# Altium PCB WS2812B_Ring_Light.PcbDoc
Units mm, origin at the board's own origin, x right, y up, seen from the top; angles counter-clockwise.
Board outline 100 x 100 mm, 2 copper layers (Top Layer, Bottom Layer); 89 components, 47 nets, 284 pads, 81 vias.
Unrouted connection lines stored in the file: 181.
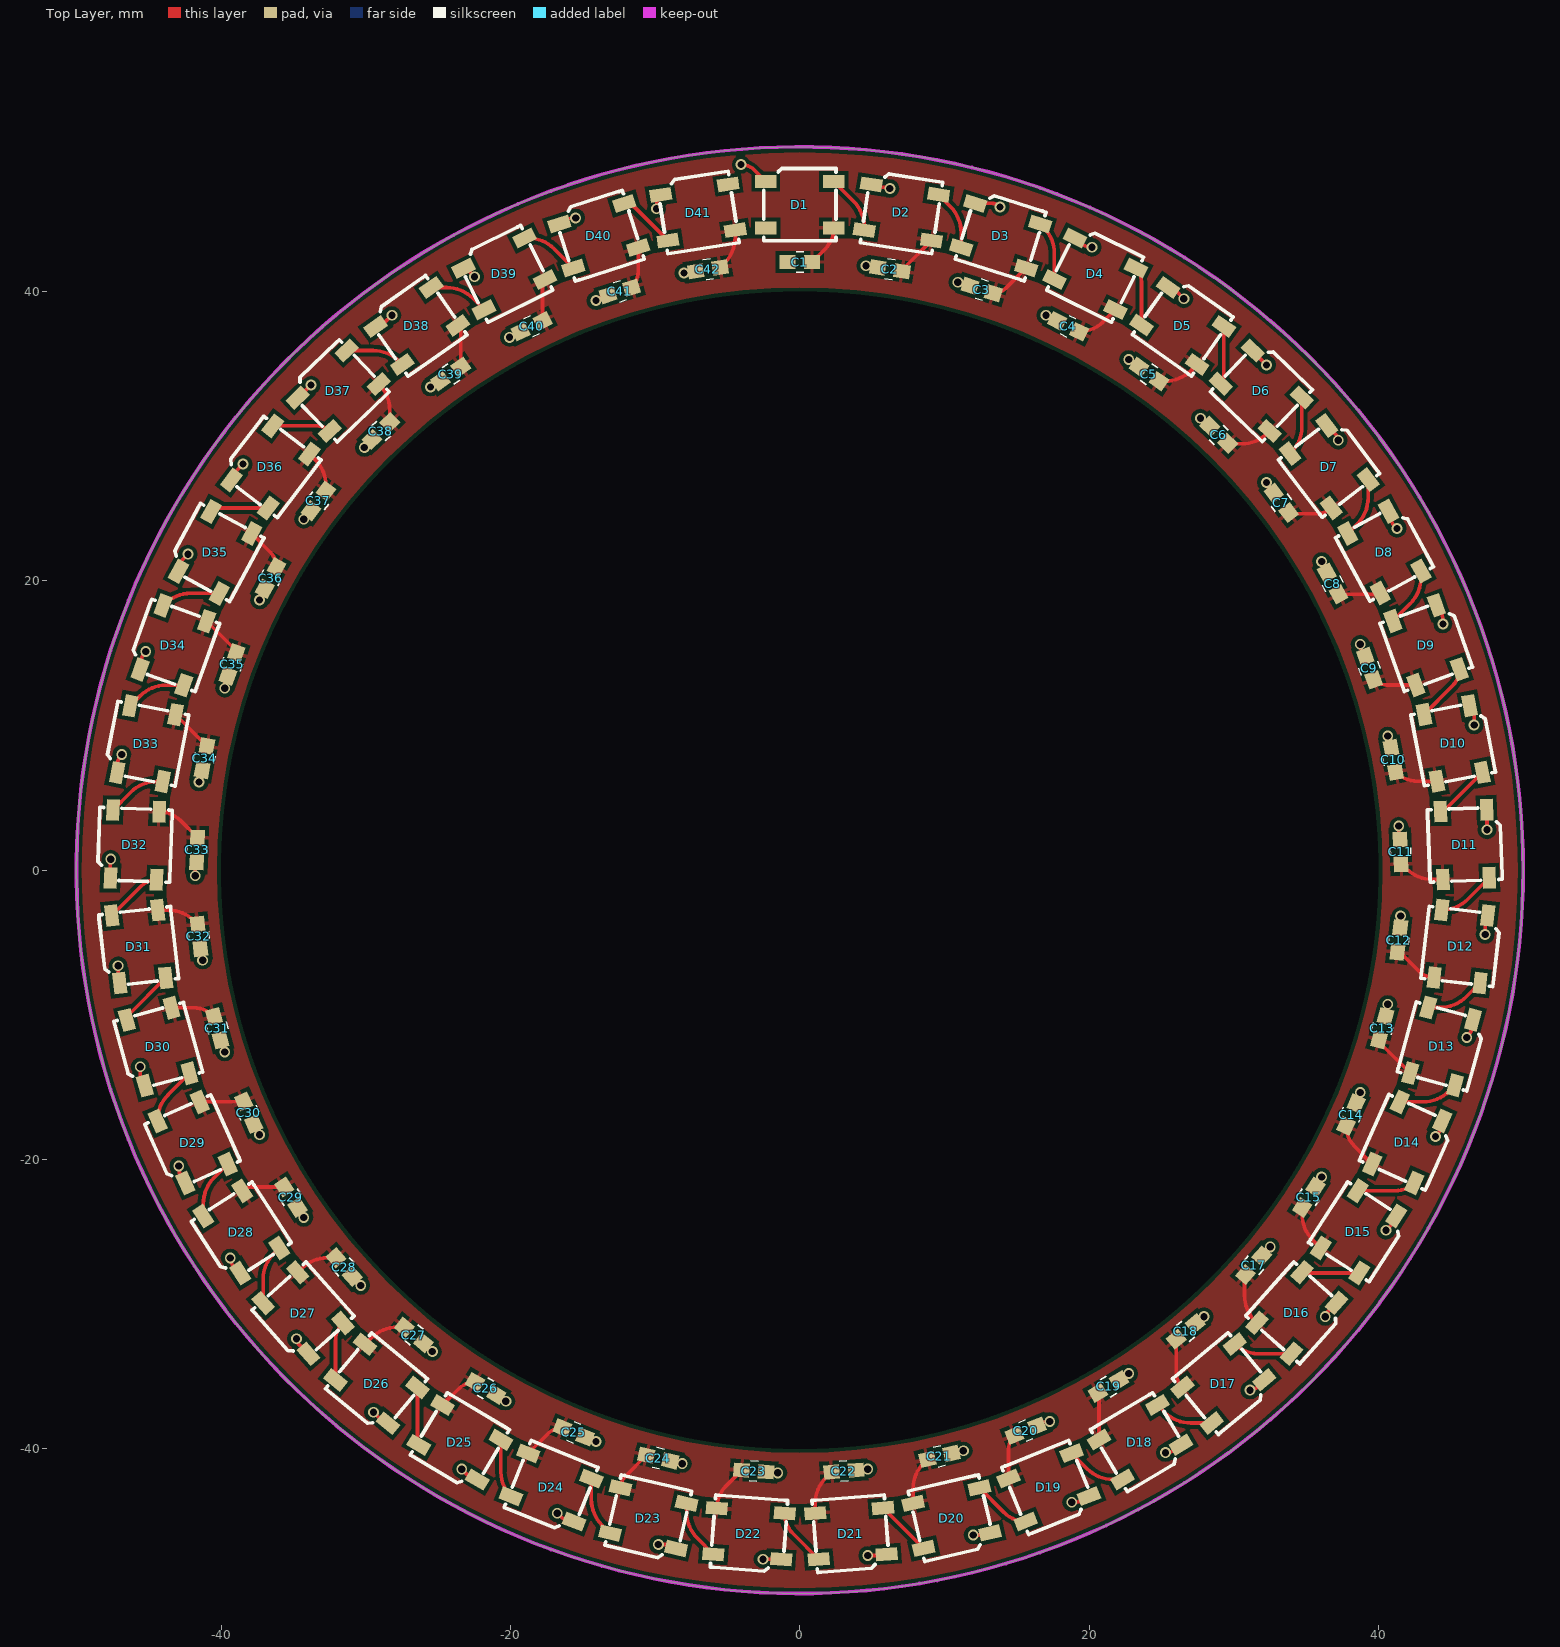
[diagram p0: Top Layer view]
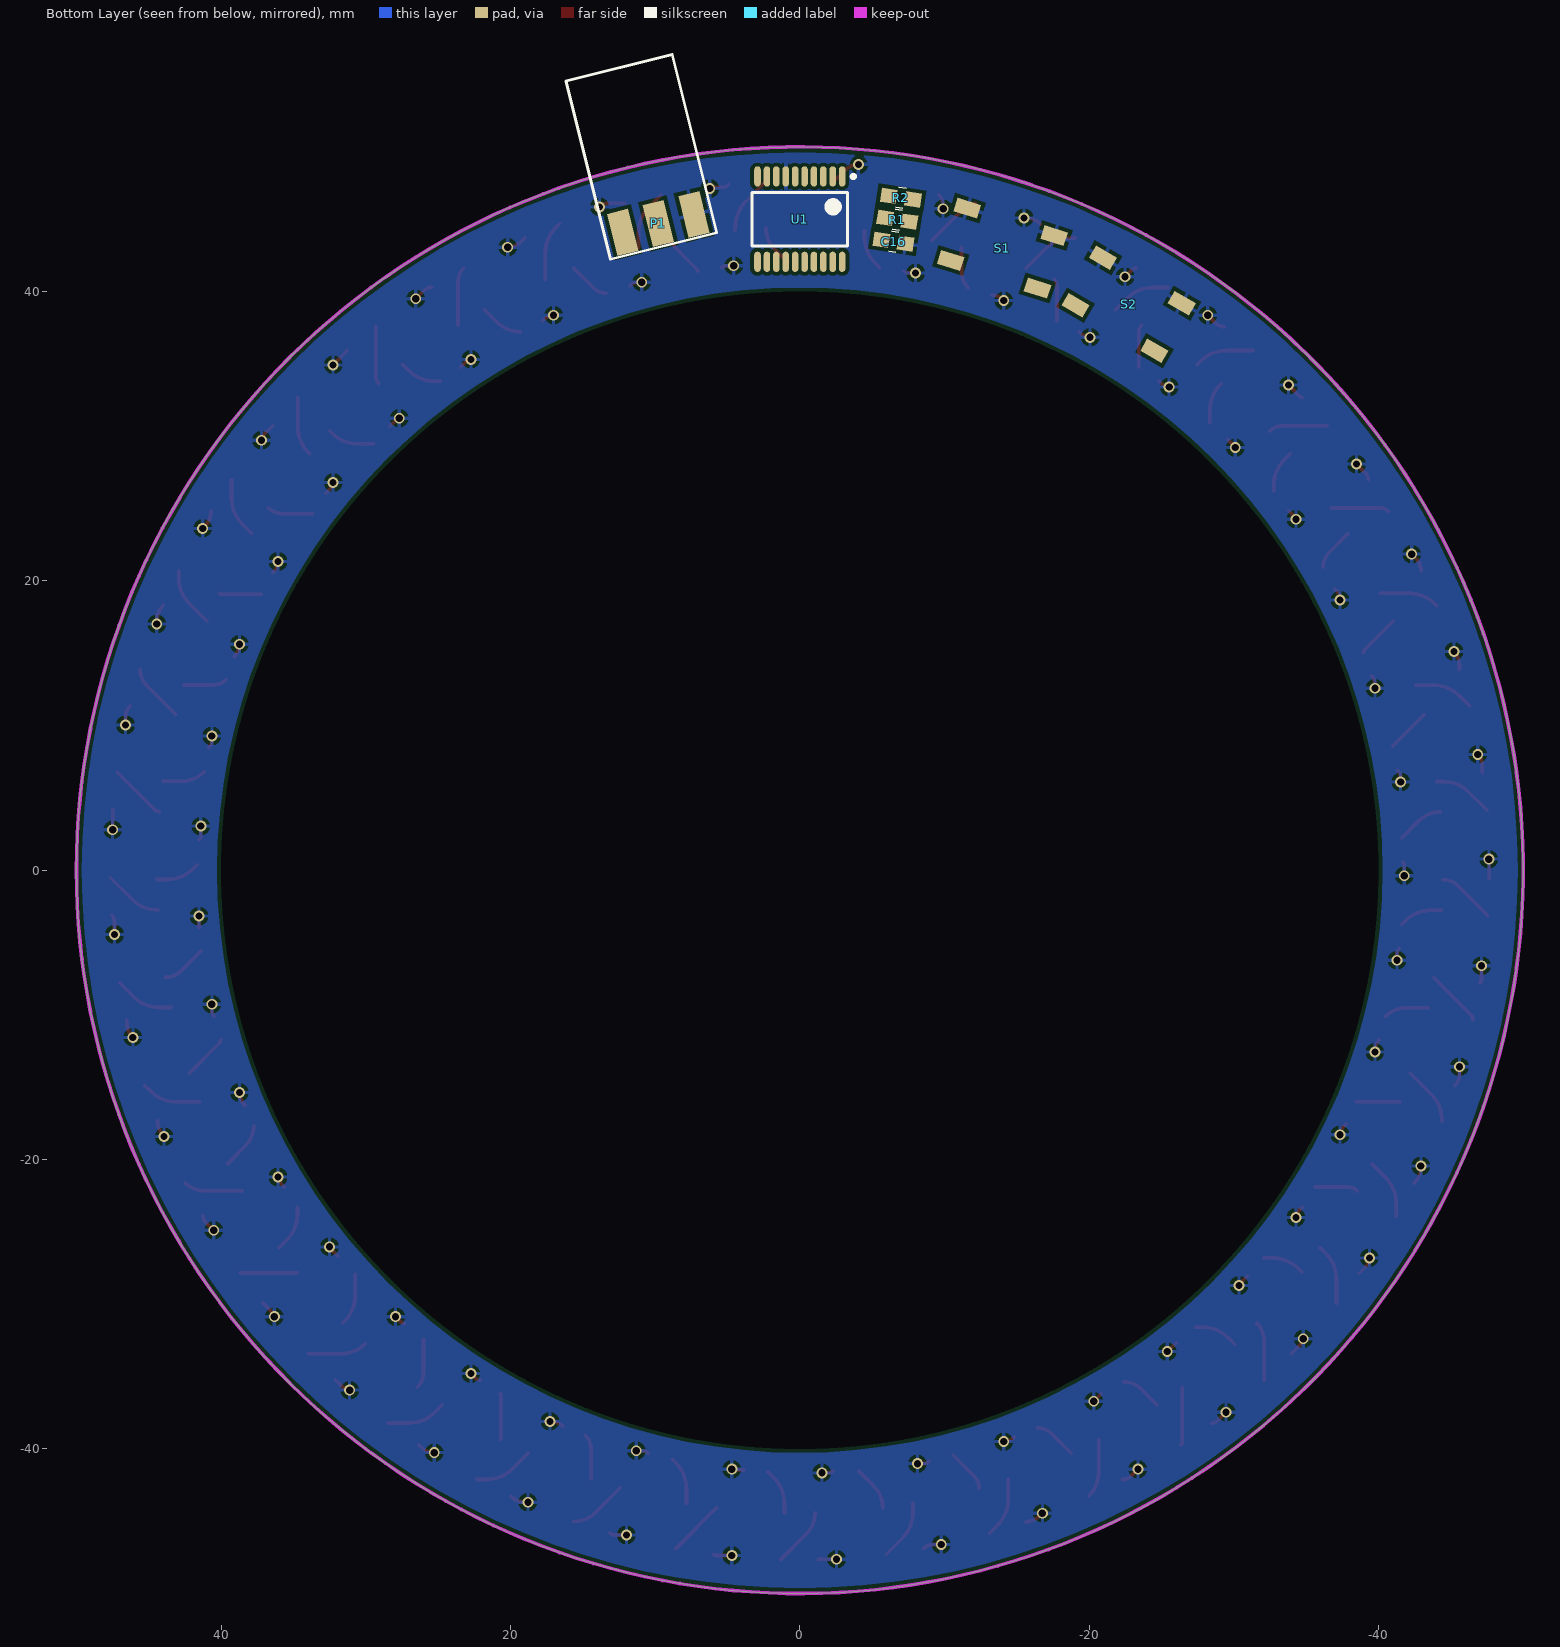
[diagram p1: Bottom Layer view, seen from below]
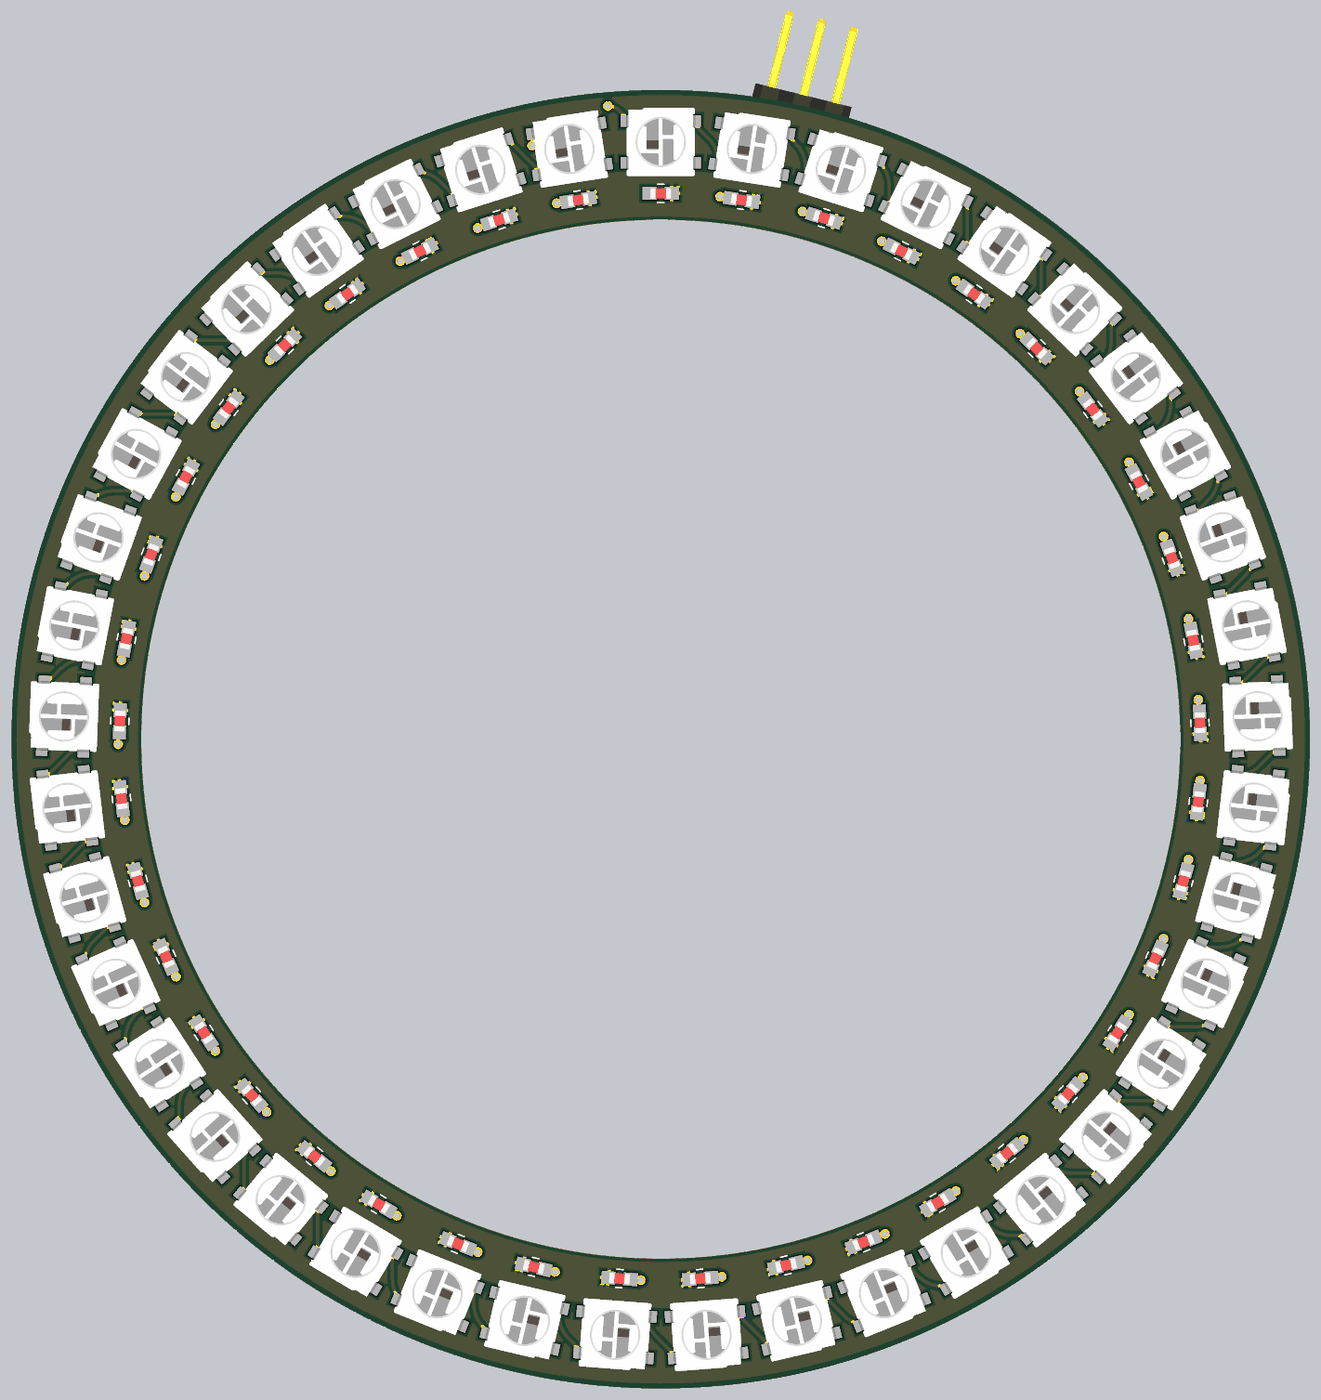
[diagram p2: 3D render of the assembled board from above, using the file's embedded part models]
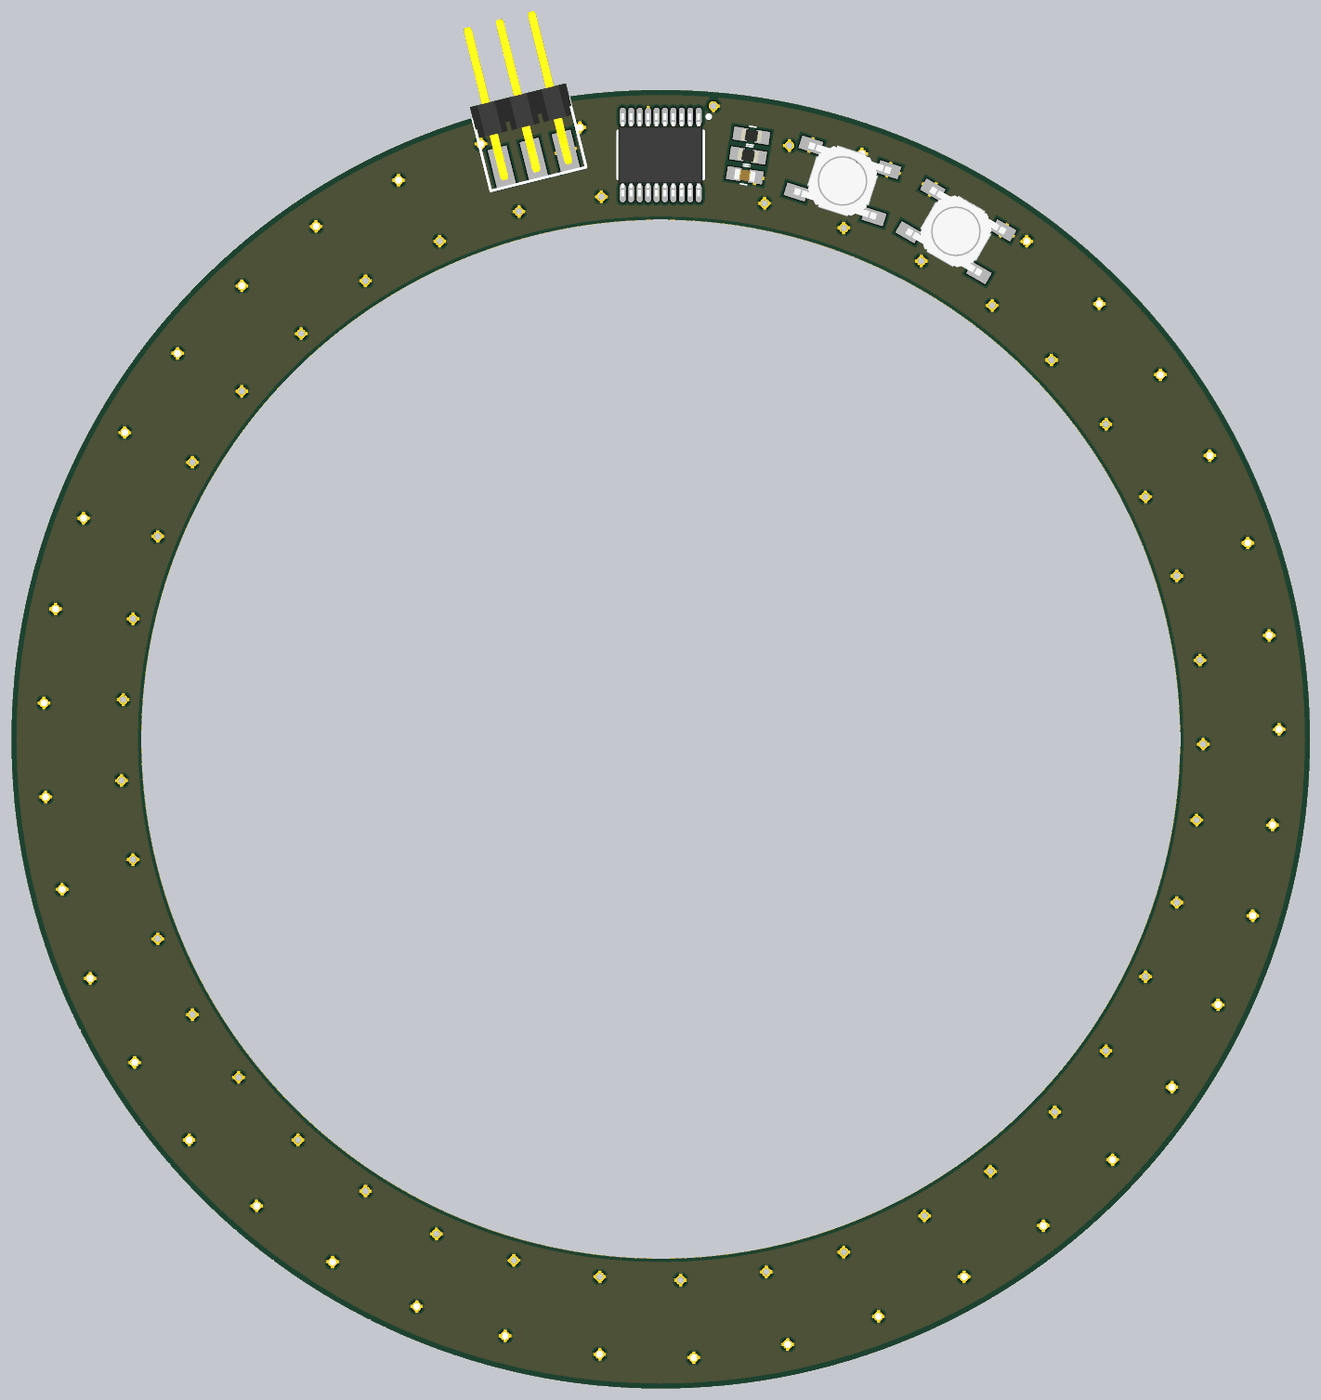
[diagram p3: 3D render of the assembled board from below, using the file's embedded part models]

## Layer stack, top to bottom
Top Solder: solder mask 0.0102, Solder Resist, Dk 3.5
Top Layer: signal copper 0.0356
Dielectric 1: dielectric 0.32, FR-4, Dk 4.8
Bottom Layer: signal copper 0.0356
Bottom Solder: solder mask 0.0102, Solder Resist, Dk 3.5

## Board outline
0,-50 cw(c0,0) -50,0 cw(c0,0) 0,50 cw(c0,0) 50,0 cw(c0,0)

## Design rules (kind name [scope] priority, off if disabled: settings)
Clearance [All] p1: gap=0.254 ignorepadtopadclearanceinfootprint=FALSE except(0: Arc-Hole Track-Hole SMDPad-Hole THPad-Hole Via-Hole Fill-Hole Poly-Hole Region-Hole Text-Hole)
PolygonConnect [All] p1: connectstyle=Relief reliefconductorwidth=0.254 reliefentries=4 polygonreliefangle="90 Angle" airgapwidth=0.254
RoutingVias [All] p1: holewidth=0.711 width=1 viastyle="Through Hole" minholewidth=0.45 minwidth=0.6 maxholewidth=0.55 maxwidth=0.75
SolderMaskExpansion [All] p1: expansion=0.102 istentingtop=FALSE
Width [All] p1: maxlimit=0.254 minlimit=0.254 preferedwidth=0.254
30 further rules are at their usual default settings.

## Components (designator, comment, footprint, x,y, rotation, side; value= is the part's Value field where it differs from the comment)
C1 "C0603 100nF 25V X7R" C0603-IPC 0,42.037 r0 top value=100nF
C2 "C0603 100nF 25V X7R" C0603-IPC 6.223,41.529 r351.22 top value=100nF
C3 "C0603 100nF 25V X7R" C0603-IPC 12.573,40.132 r342.44 top value=100nF
C4 "C0603 100nF 25V X7R" C0603-IPC 18.542,37.592 r333.66 top value=100nF
C5 "C0603 100nF 25V X7R" C0603-IPC 24.13,34.29 r324.88 top value=100nF
C6 "C0603 100nF 25V X7R" C0603-IPC 28.956,30.099 r316.1 top value=100nF
C7 "C0603 100nF 25V X7R" C0603-IPC 33.274,25.4 r307.32 top value=100nF
C8 "C0603 100nF 25V X7R" C0603-IPC 36.83,19.812 r298.54 top value=100nF
C9 "C0603 100nF 25V X7R" C0603-IPC 39.37,13.97 r289.76 top value=100nF
C10 "C0603 100nF 25V X7R" C0603-IPC 41.021,7.62 r280.98 top value=100nF
C11 "C0603 100nF 25V X7R" C0603-IPC 41.529,1.27 r272.2 top value=100nF
C12 "C0603 100nF 25V X7R" C0603-IPC 41.402,-4.826 r263.42 top value=100nF
C13 "C0603 100nF 25V X7R" C0603-IPC 40.259,-10.922 r254.64 top value=100nF
C14 "C0603 100nF 25V X7R" C0603-IPC 38.1,-16.891 r245.86 top value=100nF
C15 "C0603 100nF 25V X7R" C0603-IPC 35.179,-22.606 r237.08 top value=100nF
C16 "C0603 1uF 10V X7R" C0603-IPC -6.477,43.434 r188.8 bottom value="1 uF"
C17 "C0603 100nF 25V X7R" C0603-IPC 31.369,-27.305 r228.3 top value=100nF
C18 "C0603 100nF 25V X7R" C0603-IPC 26.67,-31.877 r219.52 top value=100nF
C19 "C0603 100nF 25V X7R" C0603-IPC 21.336,-35.687 r210.74 top value=100nF
C20 "C0603 100nF 25V X7R" C0603-IPC 15.621,-38.735 r201.96 top value=100nF
C21 "C0603 100nF 25V X7R" C0603-IPC 9.652,-40.513 r193.18 top value=100nF
C22 "C0603 100nF 25V X7R" C0603-IPC 3.048,-41.529 r184.4 top value=100nF
C23 "C0603 100nF 25V X7R" C0603-IPC -3.175,-41.529 r175.62 top value=100nF
C24 "C0603 100nF 25V X7R" C0603-IPC -9.779,-40.64 r166.84 top value=100nF
C25 "C0603 100nF 25V X7R" C0603-IPC -15.621,-38.862 r158.06 top value=100nF
C26 "C0603 100nF 25V X7R" C0603-IPC -21.717,-35.814 r149.28 top value=100nF
C27 "C0603 100nF 25V X7R" C0603-IPC -26.67,-32.131 r140.5 top value=100nF
C28 "C0603 100nF 25V X7R" C0603-IPC -31.496,-27.432 r131.72 top value=100nF
C29 "C0603 100nF 25V X7R" C0603-IPC -35.179,-22.606 r122.94 top value=100nF
C30 "C0603 100nF 25V X7R" C0603-IPC -38.1,-16.764 r114.16 top value=100nF
C31 "C0603 100nF 25V X7R" C0603-IPC -40.259,-10.922 r105.38 top value=100nF
C32 "C0603 100nF 25V X7R" C0603-IPC -41.529,-4.572 r96.6 top value=100nF
C33 "C0603 100nF 25V X7R" C0603-IPC -41.656,1.397 r87.82 top value=100nF
C34 "C0603 100nF 25V X7R" C0603-IPC -41.148,7.747 r79.04 top value=100nF
C35 "C0603 100nF 25V X7R" C0603-IPC -39.243,14.224 r70.26 top value=100nF
C36 "C0603 100nF 25V X7R" C0603-IPC -36.576,20.193 r61.48 top value=100nF
C37 "C0603 100nF 25V X7R" C0603-IPC -33.274,25.527 r52.7 top value=100nF
C38 "C0603 100nF 25V X7R" C0603-IPC -28.956,30.353 r43.92 top value=100nF
C39 "C0603 100nF 25V X7R" C0603-IPC -24.13,34.29 r35.14 top value=100nF
C40 "C0603 100nF 25V X7R" C0603-IPC -18.542,37.592 r26.36 top value=100nF
C41 "C0603 100nF 25V X7R" C0603-IPC -12.446,40.005 r17.58 top value=100nF
C42 "C0603 100nF 25V X7R" C0603-IPC -6.35,41.529 r8.8 top value=100nF
D1 "WS2812B" WS2812B 0,46 r180 top
D2 "WS2812B" WS2812B 7.021,45.461 r171.22 top
D3 "WS2812B" WS2812B 13.878,43.856 r162.44 top
D4 "WS2812B" WS2812B 20.41,41.224 r153.66 top
D5 "WS2812B" WS2812B 26.463,37.626 r144.88 top
D6 "WS2812B" WS2812B 31.896,33.145 r136.1 top
D7 "WS2812B" WS2812B 36.582,27.888 r127.32 top
D8 "WS2812B" WS2812B 40.41,21.978 r118.54 top
D9 "WS2812B" WS2812B 43.291,15.552 r109.76 top
D10 "WS2812B" WS2812B 45.158,8.761 r100.98 top
D11 "WS2812B" WS2812B 45.966,1.766 r92.2 top
D12 "WS2812B" WS2812B 45.697,-5.271 r83.42 top
D13 "WS2812B" WS2812B 44.357,-12.185 r74.64 top
D14 "WS2812B" WS2812B 41.977,-18.813 r65.86 top
D15 "WS2812B" WS2812B 38.614,-25 r57.08 top
D16 "WS2812B" WS2812B 34.345,-30.601 r48.3 top
D17 "WS2812B" WS2812B 29.272,-35.485 r39.52 top
D18 "WS2812B" WS2812B 23.513,-39.537 r30.74 top
D19 "WS2812B" WS2812B 17.202,-42.662 r21.96 top
D20 "WS2812B" WS2812B 10.489,-44.788 r13.18 top
D21 "WS2812B" WS2812B 3.529,-45.864 r4.4 top
D22 "WS2812B" WS2812B -3.513,-45.866 r355.62 top
D23 "WS2812B" WS2812B -10.473,-44.792 r346.84 top
D24 "WS2812B" WS2812B -17.187,-42.668 r338.06 top
D25 "WS2812B" WS2812B -23.499,-39.545 r329.28 top
D26 "WS2812B" WS2812B -29.26,-35.495 r320.5 top
D27 "WS2812B" WS2812B -34.335,-30.613 r311.72 top
D28 "WS2812B" WS2812B -38.605,-25.013 r302.94 top
D29 "WS2812B" WS2812B -41.971,-18.827 r294.16 top
D30 "WS2812B" WS2812B -44.353,-12.2 r285.38 top
D31 "WS2812B" WS2812B -45.695,-5.287 r276.6 top
D32 "WS2812B" WS2812B -45.967,1.75 r267.82 top
D33 "WS2812B" WS2812B -45.161,8.746 r259.04 top
D34 "WS2812B" WS2812B -43.297,15.537 r250.26 top
D35 "WS2812B" WS2812B -40.418,21.963 r241.48 top
D36 "WS2812B" WS2812B -36.592,27.875 r232.7 top
D37 "WS2812B" WS2812B -31.908,33.134 r223.92 top
D38 "WS2812B" WS2812B -26.477,37.616 r215.14 top
D39 "WS2812B" WS2812B -20.424,41.217 r206.36 top
D40 "WS2812B" WS2812B -13.894,43.852 r197.58 top
D41 "WS2812B" WS2812B -7.037,45.459 r188.8 top
P1 "Header 1x3" "HEADER 1X3 SMD 2.54mm" 12.244,44.09 r166 bottom
R1 "R0603 10K 1%" R0603-IPC -6.731,44.958 r188.8 bottom value=10k
R2 "R0603 10K 1%" R0603-IPC -6.985,46.482 r188.8 bottom value=10k
S1 "NRST" TL3342F260QG -14,43 r197.58 bottom
S2 "NRST" TL3342F260QG -22.733,39.116 r210 bottom
U1 "STM8S003F3P6TR" TSOP65P640X120-20N 0,45 r270 bottom

## Footprints (in the part's own frame and the unit in brackets; to place one, negate y for a bottom-side part, rotate by r counter-clockwise, add the part's x,y. Pads: shape width x height; smd on the part's side, far side on the other; paste and mask are expansions set on the pad)
C0603-IPC [mm]
  rect 1.1x1 smd: 1(-0.85,0) 2(0.85,0)
  silkscreen extent -0.24,-0.7 0.26,0.7, body extent -0.8,-0.4 0.8,0.4, height 0.3
"HEADER 1X3 SMD 2.54mm" [mm] "Connector; Header; 3 Position"
  rect 1.5x3 smd: 1(0,0) 2(2.54,0) 3(5.08,0)
  silkscreen extent -1.27,-1.6 6.3,11.1, body extent -1.27,-1.05 6.35,11.05, height 2.54
R0603-IPC [mm]
  rect 1.1x1 smd: 1(-0.85,0) 2(0.85,0)
  silkscreen extent -0.25,-0.7 0.25,0.7, body extent -0.77,-0.43 0.78,0.43, height 0.44
TL3342F260QG [mm] "SWITCH TACTILE SPST-NO 0.05A 12V"
  rect 1.7x1 smd: 1(-3.15,-1.9) 2(3.15,-1.9) 3(-3.15,1.9) 4(3.15,1.9)
  body extent -3.3,-2.5 3.3,2.5, height 1.46
TSOP65P640X120-20N [mm] "TSOP, 20-Leads, Body 6.50x4.40mm, Pitch 0.65mm, IPC Medium Density"
  oval 1.4x0.45 smd: 1(-2.95,2.925) 2(-2.95,2.275) 3(-2.95,1.625) 4(-2.95,0.975) 5(-2.95,0.325) 6(-2.95,-0.325) 7(-2.95,-0.975) 8(-2.95,-1.625) 9(-2.95,-2.275) 10(-2.95,-2.925) 11(2.95,-2.925) 12(2.95,-2.275) 13(2.95,-1.625) 14(2.95,-0.975) 15(2.95,-0.325) 16(2.95,0.325) 17(2.95,0.975) 18(2.95,1.625) 19(2.95,2.275) 20(2.95,2.925)
  silkscreen extent -3.07,-3.3 1.85,3.82, body extent -3.21,-3.27 3.21,3.23, height 1.3
WS2812B [mm] "WS2812 Individually Addressable LED"
  rect 1.5x0.9 smd: 1(-2.35,1.6) 2(-2.35,-1.6) 3(2.35,-1.6) 4(2.35,1.6)
  silkscreen extent -2.5,-2.5 2.5,2.5, body extent -2.67,-2.48 2.68,2.47, height 1.71

## Part data
C1 C2 C3 C4 C5 C6 C7 C8 C9 C10 C11 C12 C13 C14 C15 C17 C18 C19 C20 C21 C22 C23 C24 C25 C26 C27 C28 C29 C30 C31 C32 C33 C34 C35 C36 C37 C38 C39 C40 C41 C42: "Chip Capacitor, 0603, 100nF, 25V, X7R", Max. Voltage=25V, Supplier Part Number 1=490-1524-1-ND, EIA Code=X7R, Supplier 1=Digi-Key
C16: "Chip Capacitor, 0603, 1uF +/- 0.1uF, 10V, X7R", Max. Voltage=10V, Supplier Part Number 1=1276-1946-1-ND, EIA Code=X7R, Supplier 1=Digi-Key
D1 D2 D3 D4 D5 D6 D7 D8 D9 D10 D11 D12 D13 D14 D15 D16 D17 D18 D19 D20 D21 D22 D23 D24 D25 D26 D27 D28 D29 D30 D31 D32 D33 D34 D35 D36 D37 D38 D39 D40 D41: "Addressable Lighting - Discrete Serial Red, Green, Blue (RGB) 5.00mm L x 5.00mm WS2812B", Supplier Part Number 1=1528-1104-ND, Supplier 1=Digi-Key, Supplier 2=Mouser, Supplier 3=LCSC, Supplier Part Number 2=485-1655, Supplier Part Number 3=C114586
P1: "Header, 3-Pin", LatestRevisionDate=17-Jul-2002, LatestRevisionNote="Re-released for DXP Platform.", Publisher="Altium Limited"
R1 R2: "RES SMD 10K OHM 1% 1/10W 0603", Supplier Part Number 1=RMCF0603FT10K0CT-ND, Supplier 1=Digi-Key
S1 S2: library part "SWITCH TACTILE SPST", "SWITCH TACTILE SPST-NO 0.05A 12V", Manufacturer Part Number=TL3342F260QG, Supplier Part Number 1=EG5470CT-ND, Supplier 1=Digi-Key
U1: "STM8 STM8S Microcontroller IC 8-Bit 16MHz 8KB (8K x 8) FLASH 20-TSSOP", Supplier Part Number 1=497-18051-1-ND, Supplier 1=Digi-Key, Supplier 2=Mouser, Supplier 3=LCSC, Supplier Part Number 2=511-STM8S003F3P6TR, Supplier Part Number 3=C52717

## Free pads (board coordinates)
  round 0 hole 80: 4(0,0)

## Via types
v1: diameter 0.75, hole 0.5, Top Layer to Bottom Layer, 81 vias

## Nets (pads, with @x,y where several pads share a name; then routed paths per layer and width w, separated by ;. In a path a pad name is that pad's centre, name@x,y a point inside that pad or via, vN(x,y) a via of type N, cw(c..) or ccw(c..) an arc to the next point about the centre after c; other vN are vias at no path point)
GND: C1.1 C2.1 C3.1 C4.1 C5.1 C6.1 C7.1 C8.1 C9.1 C10.1 C11.1 C12.1 C13.1 C14.1 C15.1 C16.2 C17.1 C18.1 C19.1 C20.1 C21.1 C22.1 C23.1 C24.1 C25.1 C26.1 C27.1 C28.1 C29.1 C30.1 C31.1 C32.1 C33.1 C34.1 C35.1 C36.1 C37.1 C38.1 C39.1 C40.1 C41.1 C42.1 D1.3 D2.3 D3.3 D4.3 D5.3 D6.3 D7.3 D8.3 D9.3 D10.3 D11.3 D12.3 D13.3 D14.3 D15.3 D16.3 D17.3 D18.3 D19.3 D20.3 D21.3 D22.3 D23.3 D24.3 D25.3 D26.3 D27.3 D28.3 D29.3 D30.3 D31.3 D32.3 D33.3 D34.3 D35.3 D36.3 D37.3 D38.3 D39.3 D40.3 D41.3 P1.3 S1.3 S1.4 S2.3 S2.4 U1.7 | length 89.7
  Top Layer w0.254: D32.3 -47.655,0.69 cw(c-47.553,0.69) v1(-47.625,0.762) ; D33.3 -47.179,7.239 cw(c-46.101,7.239) v1(-46.863,8.001) ; v1(-47.117,-6.604) -47.117,-7.558 ccw(c-46.767,-7.558) D31.3 ; D34.3 -45.597,14.185 cw(c-44.284,14.185) v1(-45.212,15.113) ; v1(-45.593,-13.589) -45.593,-14.116 ccw(c-44.497,-14.116) D30.3 ; D35.3 cw(c-41.674,20.663) -42.573,21.562 v1(-42.291,21.844) ; v1(-42.926,-20.447) -42.926,-20.522 ccw(c-41.365,-20.522) D29.3 ; v1(-41.783,-0.381) -41.783,0.319 cw(c-41.46,0.319) C33.1 ; v1(-41.529,6.096) -41.529,6.383 cw(c-40.78,6.383) C34.1 ; C32.1 cw(c-41.809,-5.794) -41.275,-5.794 v1(-41.275,-6.223) ; C31.1 cw(c-40.716,-12.424) -39.751,-12.424 v1(-39.751,-12.573) ; v1(-39.751,12.573) -39.751,12.891 cw(c-38.997,12.891) C35.1 ; v1(-39.37,-26.797) ccw(c-38.505,-26.797) -39.117,-27.409 D28.3 ; D36.3 cw(c-38.604,26.976) -39.088,27.46 v1(-38.481,28.067) ; C30.1 -37.574,-17.717 cw(c-38.145,-18.288) v1(-37.338,-18.288) ; v1(-37.338,18.669) cw(c-36.322,18.669) -37.04,19.388 C36.1 ; v1(-34.798,-32.385) ccw(c-34.283,-32.385) -34.647,-32.749 D27.3 ; C29.1 -34.472,-23.565 cw(c-34.91,-24.003) v1(-34.29,-24.003) ; D37.3 ccw(c-34.711,32.795) -34.613,32.697 v1(-33.782,33.528) ; v1(-34.29,24.257) cw(c-34.066,24.257) -34.224,24.416 C37.1 ; C28.1 -30.394,-28.603 cw(c-30.494,-28.702) v1(-30.353,-28.702) ; v1(-30.099,29.21) cw(c-30.044,29.21) v1@-30.083,29.249 ; v1@-30.083,29.249 C38.1 ; v1(-29.464,-37.465) -28.875,-38.054 ccw(c-28.464,-37.643) D26.3 ; D38.3 ccw(c-29.319,38.401) -28.733,37.815 v1(-28.194,38.354) ; C27.1 -25.412,-33.274 v1(-25.4,-33.274) ; v1(-25.527,33.401) ccw(c-25.527,34.13) -25.011,33.615 C39.1 ; v1(-23.368,-41.402) -22.899,-41.871 ccw(c-22.296,-41.268) D25.3 ; D39.3 cw(c-23.241,41.184) -22.941,41.483 v1(-22.479,41.021) ; C26.1@-20.828,-36.195 v1(-20.32,-36.703) ; v1(-20.066,36.83) ccw(c-20.066,37.742) -19.421,37.097 C40.1 ; v1(-16.764,-44.45) -16.592,-44.622 ccw(c-15.605,-43.635) D24.3 ; D40.3 cw(c-15.608,43.658) -15.608,45.085 v1(-15.494,45.085) ; C25.1 -14.811,-39.201 ccw(c-14.097,-38.487) v1(-14.097,-39.497) ; v1(-14.097,39.37) -14.046,39.421 cw(c-13.256,38.632) C41.1 ; v1(-9.906,45.72) -9.906,45.952 cw(c-8.876,45.952) D41.3 ; v1(-9.779,-46.609) -9.215,-46.609 cw(c-9.215,-47.551) D23.3 ; C24.1 ccw(c-8.499,-40.381) -8.499,-41.021 v1(-8.128,-41.021) ; v1(-8.001,41.275) -7.489,41.275 ccw(c-7.489,41.698) C42.1 ; v1(-4.064,48.768) cw(c-4.064,47.45) -3.132,48.382 D1.3 ; v1(-2.54,-47.625) -1.329,-47.625 cw(c-1.329,-47.678) D22.3 ; C23.1@-2.286,-41.529 ccw(c-1.979,-41.222) -1.979,-41.656 v1(-1.524,-41.656) ; C22.1 4.55,-41.464 ccw(c4.55,-41.253) v1(4.699,-41.402) ; v1(4.572,41.783) 5.083,41.783 cw(c5.083,41.359) C2.1 ; v1(4.699,-47.371) 5.774,-47.371 ccw(c5.774,-47.058) D21.3 ; D2.3 5.132,47.212 6.128,47.212 v1(6.223,47.117) ; C21.1 cw(c10.932,-40.771) 10.932,-40.132 v1(11.303,-40.132) ; v1(10.922,40.64) 11.155,40.64 cw(c11.155,39.781) C3.1 ; v1(11.986,-45.952) 12.8,-45.952 ccw(c12.8,-45.469) D20.3 ; D3.3 13.254,46.091 cw(c13.254,45.258) v1(13.843,45.847) ; C20.1 cw(c17.175,-39.183) 17.175,-38.1 v1(17.272,-38.1) ; v1(17.018,38.354) cw(c17.018,37.443) 17.662,38.087 C4.1 ; v1(18.796,-43.688) 18.965,-43.688 ccw(c18.965,-42.253) D19.3 ; D4.3 19.286,43.429 ccw(c20.193,44.336) v1(20.193,43.053) ; C19.1 ccw(c22.067,-34.741) 22.428,-35.103 v1(22.733,-34.798) ; v1(22.733,35.306) cw(c22.733,34.884) 23.031,35.183 C5.1 ; v1(25.273,-40.259) ccw(c25.273,-38.982) 26.176,-39.885 D18.3 ; D5.3 cw(c25.462,39.581) 25.96,40.08 v1(26.543,39.497) ; C18.1 ccw(c27.326,-31) 27.563,-31.238 v1(27.94,-30.861) ; v1(27.686,31.242) cw(c27.686,30.991) 27.863,31.169 C6.1 ; v1(31.115,-35.941) ccw(c31.115,-35.288) 31.576,-35.75 D17.3 ; D6.3 ccw(c31.451,35.928) 31.353,35.83 v1(32.258,34.925) ; C17.1 32.471,-26.134 ccw(c32.372,-26.035) v1(32.512,-26.035) ; v1(32.258,26.797) ccw(c32.79,26.797) 32.414,26.421 C7.1 ; C15.1 35.887,-21.647 ccw(c35.449,-21.209) v1(36.068,-21.209) ; v1(36.068,21.336) ccw(c37.085,21.336) 36.366,20.617 C8.1 ; v1(36.322,-30.861) cw(c36.731,-30.861) 36.442,-30.572 D16.3 ; D7.3 37.05,30.107 cw(c36.661,29.718) v1(37.211,29.718) ; C14.1@38.354,-16.256 38.376,-16.234 ccw(c37.509,-15.367) v1(38.735,-15.367) ; v1(38.735,15.621) 38.735,15.609 ccw(c39.922,15.609) C9.1 ; C13.1 ccw(c40.108,-9.726) 40.64,-9.726 v1(40.64,-9.271) ; v1(40.513,-24.892) 41.04,-24.365 ccw(c40.571,-23.896) D15.3 ; v1(40.64,9.271) 40.64,8.983 ccw(c41.388,8.983) C10.1 ; D8.3 ccw(c42.148,24.806) 41.119,23.778 v1(41.275,23.622) ; v1(41.402,3.048) 41.402,2.347 ccw(c41.724,2.347) C11.1 ; C12.1 ccw(c41.428,-3.91) 41.529,-3.91 v1(41.529,-3.175) ; v1(43.942,-18.415) 43.949,-18.408 ccw(c42.862,-17.322) D14.3 ; D9.3 cw(c42.923,17.224) 44.45,17.224 v1(44.45,17.018) ; v1(46.101,-11.557) ccw(c45.084,-10.54) 46.522,-10.54 D13.3 ; D10.3 cw(c45.489,10.581) 46.609,10.581 v1(46.609,10.033) ; v1(47.371,-4.445) 47.371,-3.566 cw(c48.002,-3.566) D12.3 ; D11.3 cw(c47.418,4.119) 47.498,4.119 v1(47.498,2.794)
LED_DATA: D1.4 U1.14
NetC16_1: C16.1 U1.8
NetD1_2: D1.2 D2.4 | length 4.1
  Top Layer w0.254: D1.2 3.711,46.239 cw(c1.915,44.443) 4.455,44.443 D2.4
NetD2_2: D2.2 D3.4 | length 4.2
  Top Layer w0.254: D2.2 10.411,45.86 cw(c8.615,44.064) 11.155,44.064 D3.4
NetD3_2: D3.2 D4.4 | length 4.1
  Top Layer w0.254: D3.2 16.85,44.424 cw(c15.054,42.628) 17.594,42.628 D4.4
NetD4_2: D4.2 D5.4 | length 4.1
  Top Layer w0.254: D4.2 cw(c22.273,40.662) 23.621,40.662 D5.4
NetD5_2: D5.2 D6.4 | length 4
  Top Layer w0.254: D6.4 ccw(c28.581,34.134) 29.306,34.134 D5.2
NetD6_2: D6.2 D7.4 | length 4.1
  Top Layer w0.254: D7.4 33.955,28.857 ccw(c32.159,30.653) 34.699,30.653 D6.2
NetD7_2: D7.2 D8.4 | length 4.2
  Top Layer w0.254: D8.4 38.535,23.931 ccw(c36.739,25.727) 39.279,25.727 D7.2
NetD8_2: D8.2 D9.4 | length 4.2
  Top Layer w0.254: D9.4 42.195,18.426 ccw(c40.399,20.222) 42.939,20.222 D8.2
NetD9_2: D9.2 D10.4 | length 4.1
  Top Layer w0.254: D10.4 45.121,12.745 ccw(c43.986,13.881) D9.2
NetD10_2: D10.2 D11.4 | length 4
  Top Layer w0.254: D11.4 ccw(c44.277,4.518) 44.606,4.189 D10.2
NetD11_2: D11.2 D12.4 | length 4.1
  Top Layer w0.254: D12.4 ccw(c44.377,-0.228) 46.162,-2.014 D11.2
NetD12_2: D12.2 D13.4 | length 4.2
  Top Layer w0.254: D13.4 44.259,-9.495 ccw(c44.259,-6.955) 46.055,-8.751 D12.2
NetD13_2: D13.2 D14.4 | length 4.2
  Top Layer w0.254: D14.4 43.086,-16.014 ccw(c43.086,-13.474) 44.882,-15.27 D13.2
NetD14_2: D14.2 D15.4 | length 4.1
  Top Layer w0.254: D15.4 41.158,-22.157 ccw(c41.158,-20.293) D14.2
NetD15_2: D15.2 D16.4 | length 4
  Top Layer w0.254: D16.4 ccw(c34.859,-27.637) 34.859,-27.842 D15.2
NetD16_2: D16.2 D17.4 | length 4.1
  Top Layer w0.254: D17.4 ccw(c31.671,-31.15) 31.671,-33.42 D16.2
NetD17_2: D17.2 D18.4 | length 4.2
  Top Layer w0.254: D18.4 25.224,-37.47 ccw(c27.02,-35.674) 27.02,-38.214 D17.2
NetD18_2: D18.2 D19.4 | length 4.2
  Top Layer w0.254: D19.4 19.853,-41.369 ccw(c21.649,-39.573) 21.649,-42.113 D18.2
NetD19_2: D19.2 D20.4 | length 4.1
  Top Layer w0.254: D20.4 14.121,-44.404 ccw(c15.621,-42.904) D19.2
NetD20_2: D20.2 D21.4 | length 4
  Top Layer w0.254: D21.4 cw(c5.749,-44.144) 5.788,-44.105 D20.2
NetD21_2: D21.2 D22.4 | length 4.1
  Top Layer w0.254: D22.4 ccw(c0.965,-44.45) -0.458,-45.873 D21.2
NetD22_2: D22.2 D23.4 | length 4.2
  Top Layer w0.254: D23.4 -7.82,-44.387 ccw(c-5.28,-44.387) -7.076,-46.184 D22.2
NetD23_2: D23.2 D24.4 | length 4.2
  Top Layer w0.254: D24.4 -14.41,-43.479 ccw(c-11.87,-43.479) -13.666,-45.275 D23.2
NetD24_2: D24.2 D25.4 | length 4.1
  Top Layer w0.254: D25.4 -20.661,-41.593 ccw(c-18.284,-41.593) D24.2
NetD25_2: D25.2 D26.4 | length 4
  Top Layer w0.254: D26.4 -26.429,-39.497 ccw(c-26.114,-39.497) D25.2
NetD26_2: D26.2 D27.4 | length 4.1
  Top Layer w0.254: D26.2 -32.091,-32.543 cw(c-30.335,-32.543) D27.4
NetD27_2: D27.2 D28.4 | length 4.2
  Top Layer w0.254: D27.2 -37.093,-28.276 cw(c-34.553,-28.276) -36.349,-26.48 D28.4
NetD28_2: D28.2 D29.4 | length 4.2
  Top Layer w0.254: D28.2 -41.226,-23.045 cw(c-38.686,-23.045) -40.482,-21.249 D29.4
NetD29_2: D29.2 D30.4 | length 4.1
  Top Layer w0.254: D29.2 -44.392,-17.299 cw(c-41.852,-17.299) -43.648,-15.503 D30.4
NetD30_2: D30.2 D31.4 | length 4
  Top Layer w0.254: D30.2 cw(c-45.944,-10.359) -46.35,-9.952 D31.4
NetD31_2: D31.2 D32.4 | length 4.1
  Top Layer w0.254: D31.2 -45.516,-1.098 cw(c-44.457,-2.157) D32.4
NetD32_2: D32.2 D33.4 | length 4.1
  Top Layer w0.254: D32.2 -46.245,5.39 cw(c-44.449,3.594) -44.449,6.134 D33.4
NetD33_2: D33.2 D34.4 | length 4.2
  Top Layer w0.254: D33.2 -45.602,12.04 cw(c-43.806,10.244) -43.806,12.784 D34.4
NetD34_2: D34.2 D35.4 | length 4.1
  Top Layer w0.254: D34.2 -43.907,18.391 cw(c-42.111,16.595) -42.111,19.135 D35.4
NetD35_2: D35.2 D36.4 | length 4
  Top Layer w0.254: D35.2 cw(c-40.112,24.202) -40.112,25.037 D36.4
NetD36_2: D36.2 D37.4 | length 4
  Top Layer w0.254: D36.2 -33.367,30.714 cw(c-33.367,29.476) D37.4
NetD37_2: D37.2 D38.4 | length 4.1
  Top Layer w0.254: D37.2 -29.491,35.917 cw(c-29.491,33.377) -27.695,35.173 D38.4
NetD38_2: D38.2 D39.4 | length 4.2
  Top Layer w0.254: D38.2 -24.409,40.277 cw(c-24.409,37.737) -22.613,39.533 D39.4
NetD39_2: D39.2 D40.4 | length 4.1
  Top Layer w0.254: D39.2 -18.78,43.694 cw(c-18.78,41.154) -16.984,42.95 D40.4
NetD40_2: D40.2 D41.4 | length 4
  Top Layer w0.254: D40.2 cw(c-12.137,44.993) -11.363,45.766 D41.4
NRST: R1.1 S1.1 S1.2 U1.4
SW1_N: R2.1 S2.1 S2.2 U1.3
SWIM: P1.2 U1.18
VCC: C1.2 C2.2 C3.2 C4.2 C5.2 C6.2 C7.2 C8.2 C9.2 C10.2 C11.2 C12.2 C13.2 C14.2 C15.2 C17.2 C18.2 C19.2 C20.2 C21.2 C22.2 C23.2 C24.2 C25.2 C26.2 C27.2 C28.2 C29.2 C30.2 C31.2 C32.2 C33.2 C34.2 C35.2 C36.2 C37.2 C38.2 C39.2 C40.2 C41.2 C42.2 D1.1 D2.1 D3.1 D4.1 D5.1 D6.1 D7.1 D8.1 D9.1 D10.1 D11.1 D12.1 D13.1 D14.1 D15.1 D16.1 D17.1 D18.1 D19.1 D20.1 D21.1 D22.1 D23.1 D24.1 D25.1 D26.1 D27.1 D28.1 D29.1 D30.1 D31.1 D32.1 D33.1 D34.1 D35.1 D36.1 D37.1 D38.1 D39.1 D40.1 D41.1 P1.1 R1.2 R2.2 U1.9 | length 126
  Top Layer w0.254: D31.1 -43.638,-2.769 cw(c-43.638,-5.309) -41.842,-3.513 C32.2 ; D32.1@-44.278,4.037 cw(c-44.278,1.951) -42.804,3.426 C33.2 ; D30.1 -41.915,-9.51 cw(c-41.915,-11.533) C31.2 ; D33.1 -40.986,8.592 C34.2 ; D29.1 cw(c-41.41,-16.091) -41.41,-16.002 C30.2@-38.481,-16.002 ; D34.1 -39.057,15.268 cw(c-39.301,15.024) C35.2 ; D28.1 cw(c-37.869,-22.842) -37.869,-21.893 C29.2 ; D35.1 -36.598,21.972 cw(c-37.63,20.94) C36.2 ; D27.1 -34.452,-27.542 cw(c-32.656,-29.338) -32.656,-26.798 C28.2 ; D36.1 -33.503,28.383 cw(c-35.299,26.587) -32.759,26.587 C37.2 ; D26.1 -29.624,-32.334 cw(c-27.828,-34.13) -27.828,-31.59 C27.2 ; D37.1 -29.088,33.594 cw(c-30.884,31.798) -28.344,31.798 C38.2 ; D25.1 -23.582,-35.85 cw(c-22.448,-36.984) C26.2 ; D38.1 cw(c-24.114,37.18) -23.435,37.18 C39.2 ; D24.1 -17.43,-38.967 cw(c-16.409,-39.988) C25.2 ; C40.2 -17.78,40.412 cw(c-17.193,40.412) D39.1 ; D23.1 cw(c-11.281,-42.699) -12.07,-41.91 C24.2 ; C41.2 ccw(c-12.759,41.386) -11.17,41.386 D40.1 ; D22.1 cw(c-3.581,-44.091) -5.103,-42.568 C23.2@-4.064,-41.529 ; C42.2 -5.214,41.955 ccw(c-7.01,43.751) -4.47,43.751 D41.1 ; C1.2 1.74,42.927 ccw(c0.267,44.4) D1.1 ; D21.1 1.063,-43.784 cw(c3.603,-43.784) 1.807,-41.988 C22.2 ; C2.2 cw(c7.269,41.399) 7.123,41.544 D2.1 ; D20.1 7.836,-42.748 cw(c10.376,-42.748) 8.58,-40.952 C21.2 ; C3.2 ccw(c13.383,41.098) 14.248,40.234 D3.1 ; D19.1 14.424,-40.039 cw(c15.819,-40.039) C20.2 ; C4.2 ccw(c19.304,39.556) 20.959,37.901 D4.1 ; D18.1 20.675,-36.258 cw(c20.764,-36.258) C19.2@20.701,-36.195 ; C5.2 25.249,33.801 ccw(c25.249,36.341) 27.045,34.545 D5.1 ; C18.2 26.014,-34.715 ccw(c27.471,-34.715) D17.1 ; C6.2@29.464,29.464 30.529,29.464 ccw(c30.529,32.004) 32.325,30.208 D6.1 ; C17.2@30.734,-27.94 30.734,-29.385 ccw(c33.274,-29.385) 31.478,-31.181 D16.1 ; C7.2@33.655,24.638 35.741,24.638 ccw(c35.741,26.042) D7.1 ; C15.2 34.717,-23.774 ccw(c37.257,-23.774) 35.461,-25.57 D15.1 ; C8.2 39.926,19.065 ccw(c39.926,19.35) D8.1 ; C14.2 ccw(c39.762,-17.667) 38.341,-19.087 D14.1 ; C9.2 ccw(c40.553,14.065) 40.553,12.799 D9.1 ; C13.2 ccw(c40.342,-11.742) 40.124,-11.959 D13.1 ; C10.2 ccw(c42.718,8.321) 42.718,6.15 D10.1 ; C12.2@41.402,-5.588 42.811,-6.997 ccw(c43.838,-5.969) D12.1 ; C11.2@41.656,0.381 41.937,0.1 ccw(c43.733,1.896) 43.733,-0.644 D11.1
pads on no net: D41.2 U1.1 U1.2 U1.5 U1.6 U1.10 U1.11 U1.12 U1.13 U1.15 U1.16 U1.17 U1.19 U1.20

## Polygon pours and split planes (outlines as drawn)
VCC on Top Layer "NONET_L-01_P-001" (solid, remove dead copper, pour order 0): -50,-50 50.038,-50 50.038,48.478 ccw(c47.498,48.478) 49.294,50.274 48.768,50.8 cw(c47.542,52.026) 47.542,50.292 -50,50.292
GND on Bottom Layer "NONET_L-01_P-001" (solid, remove dead copper, pour order 1): -50,-50 50.038,-50 50.038,48.478 ccw(c47.498,48.478) 49.294,50.274 48.768,50.8 cw(c47.542,52.026) 47.542,50.292 -50,50.292

## Keep-outs
Keep-Out Layer:
  circle w0.254: c0,0 r50